# Altium PCB idro900ma.PcbDoc
Units mil, origin at the board's own origin, x right, y up, seen from the top; angles counter-clockwise.
Board outline 6000 x 4000 mil, 2 copper layers (Top Layer, Bottom Layer); 21 components, 17 nets, 93 pads, 11 vias.
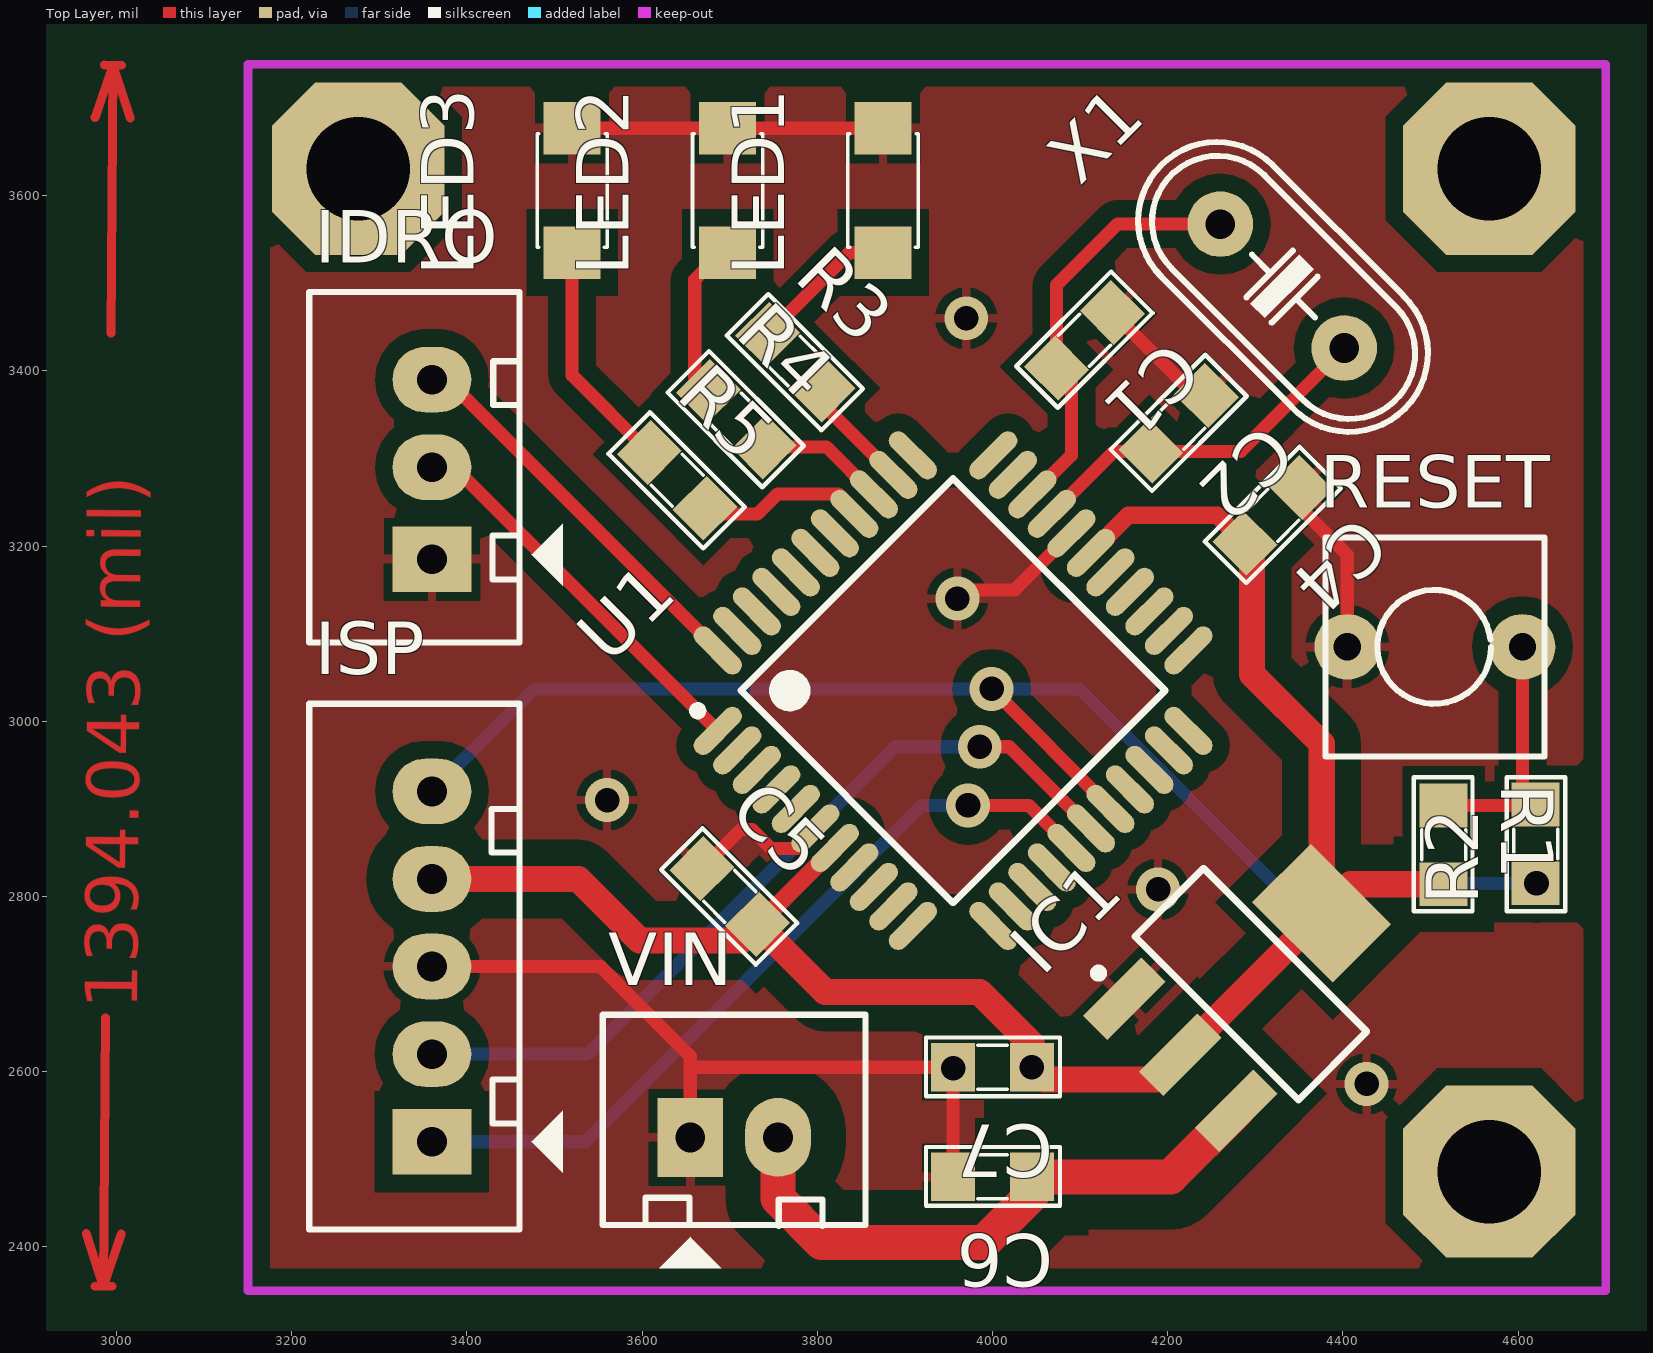
[diagram p0: Top Layer view]
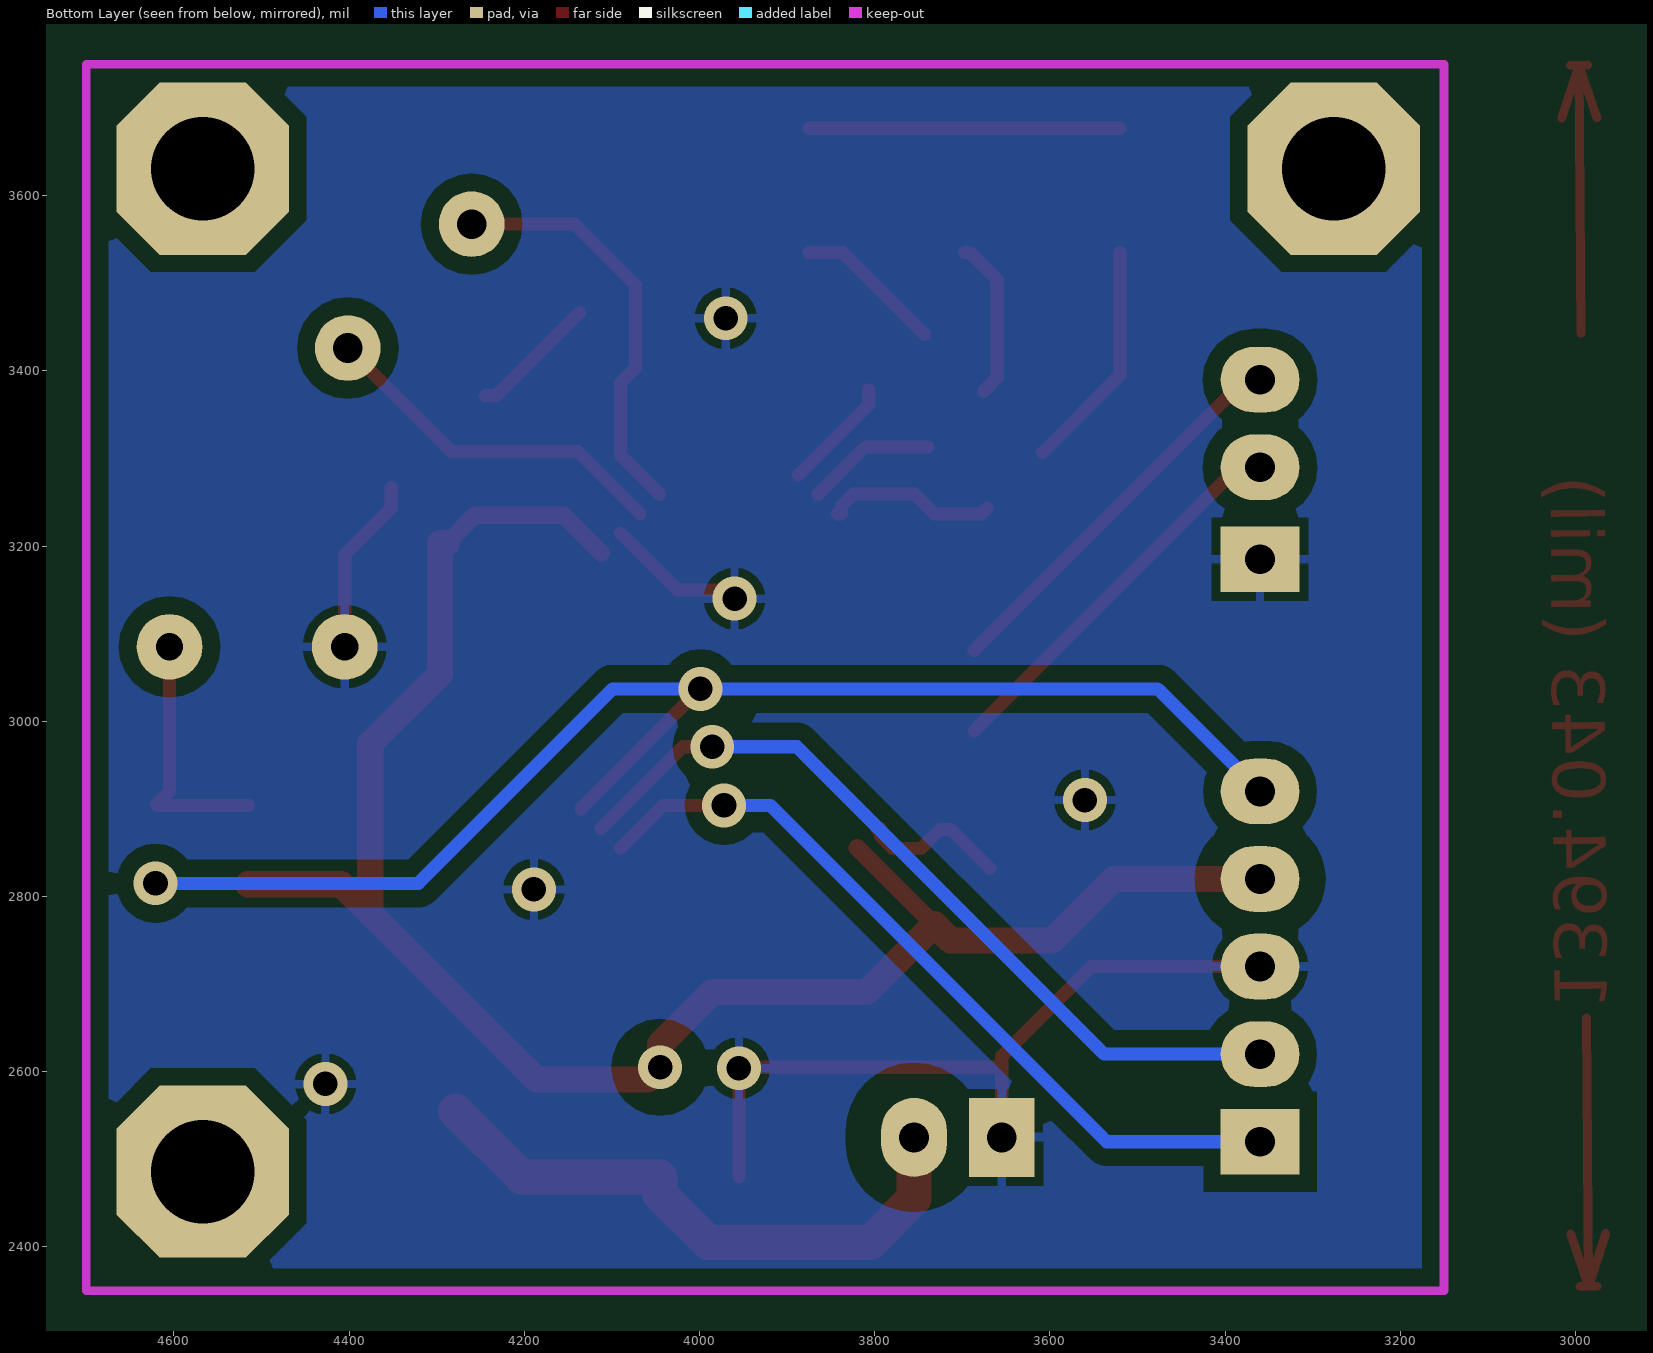
[diagram p1: Bottom Layer view, seen from below]
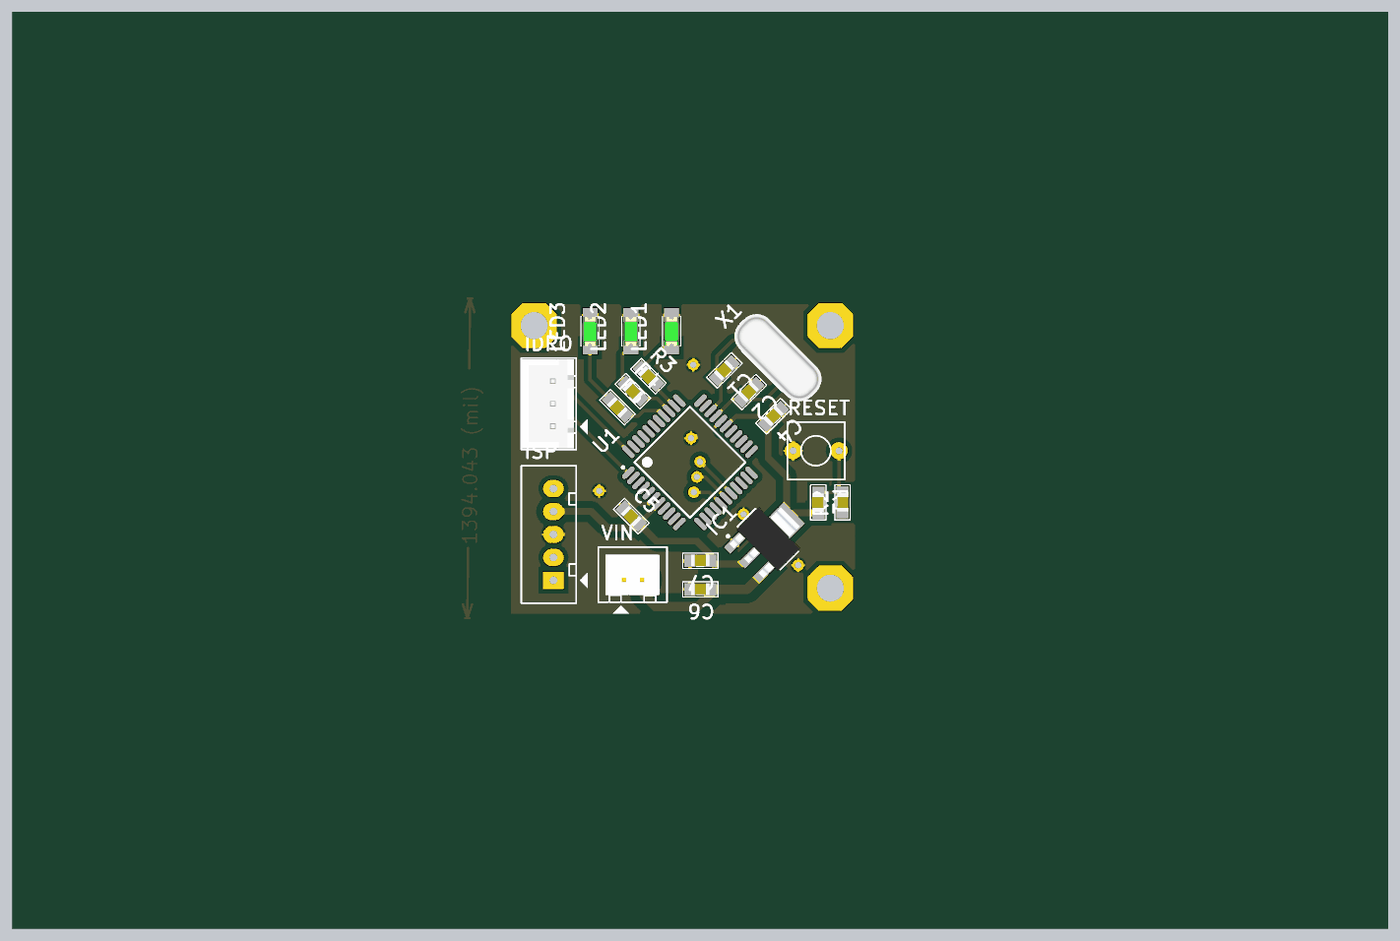
[diagram p2: 3D render of the assembled board from above, using the file's embedded part models]

## Layer stack, top to bottom
Top Layer: signal copper 1.4
Dielectric: dielectric 12.6, FR-4, Dk 4.8
Bottom Layer: signal copper 1.4

## Board outline
1000,1000 7000,1000 7000,5000 1000,5000

## Design rules (kind name [scope] priority, off if disabled: settings)
Clearance COUT [InNet('VCC-3.3V')] p1: gap=30
Clearance CIN [InNet('IN')] p2: gap=40
Clearance [All] p3: gap=20
PolygonConnect [All] p1: connectstyle=Relief reliefconductorwidth=10 reliefentries=4 polygonreliefangle="90 Angle"
RoutingVias [All] p1: holewidth=28 width=50 viastyle="Through Hole" minholewidth=28 minwidth=50 maxholewidth=28 maxwidth=50
SilkscreenOverComponentPads SilkToSolderMaskClearance [IsPad] p1: minsilkscreentomaskgap=10
SolderMaskExpansion [All] p1: expansion=4
Width OUT [InNet('VCC-3.3V')] p1: maxlimit=30 minlimit=20 preferedwidth=30
Width IN [InNet('IN')] p2: maxlimit=40 minlimit=40 preferedwidth=40
Width [All] p3: maxlimit=15 minlimit=15 preferedwidth=15
27 further rules are at their usual default settings.

## Components (designator, comment, footprint, x,y, rotation, side; value= is the part's Value field where it differs from the comment)
C1 "22pF" SM-0805 4105,3435 r225 top
C2 "2pF" SM-0805 4212.5,3340 r225 top
C4 "103" SM-0805 4320,3235 r225 top
C5 "103" SM-0805 3700,2800 r315 top
C6 "1uF/450V" SM-0805 4000,2480 r180 top
C7 "1uF/450V" SM-0805 4000,2605 r180 top
IC1 "LM1117" SOT223-4N 4295,2700 r45 top
IDRO "JP3" CON3 3360,3190 r90 top
ISP "JP5" CON5 3360,2520 r90 top
LED1 "LED" LED1206-Green 3875,3535 r90 top
LED2 "LED" LED1206-Green 3697.5,3535 r90 top
LED3 "LED" LED1206-Green 3520,3535 r90 top
R1 "4.7k" SM-0805 4515,2859 r270 top
R2 "330" SM-0805 4620,2860 r90 top
R3 "220" SM-0805 3775,3410 r315 top
R4 "220" SM-0805 3707.5,3345 r315 top
R5 "220" SM-0805 3640,3275 r315 top
RESET "SW" SW2 4405,3085 r0 top
U1 "PIC18F46K20-I/PT" TQFP-PT44_N 3955,3035 r45 top
VIN "JP2" CON2 3655,2525 r0 top
X1 "4Mhz" XT2 4330.75,3496.82 r135 top

## Footprints (in the part's own frame and the unit in brackets; to place one, negate y for a bottom-side part, rotate by r counter-clockwise, add the part's x,y. Pads: shape width x height; smd on the part's side, far side on the other; paste and mask are expansions set on the pad)
CON2 [mil] "CON2"
  rect 75x90 hole 34: 1(0,0)
  oval 75x90 hole 34: 2(100,0)
  silkscreen extent -100,-150 200,140, body extent -68,-70 168,107, height 236
CON3 [mil] "CON 3"
  rect 75x90 hole 34: 1(-5,0)
  oval 75x90 hole 34: 2(100,0) 3(200,0)
  silkscreen extent -100,-150 300,140, body extent -95,-90 295,136, height 276
CON5 [mil] "CON5"
  rect 75x90 hole 34: 1(0,0)
  oval 75x90 hole 34: 2(100,0) 3(200,0) 4(300,0) 5(400,0)
  silkscreen extent -100,-150 500,140
LED1206-Green [mil]
  rect 60x65 smd: 1(0,0) 2(142,0)
  silkscreen extent 6,-40 136,40, body extent 7,-31 133,32, height 43
SM-0805 [mil] "Compoment SMD 80x50mil"
  rect 50x55 smd: 1(-45,0) 2(45,0)
  silkscreen extent -77,-34 76,33, body extent -40,-27 40,23, height 24
SOT223-4N [mm] "SOT223, 4-Leads, Body 6.5x3.5mm, Pitch 2.3mm, Lead Span 7mm, IPC Medium Density"
  rect 2.4x1 smd: 1(-2.9,2.3) 2(-2.9,0) 3(-2.9,-2.3)
  rect 2.4x3.3 smd: 4(2.9,0)
  silkscreen extent -3.02,-3.35 1.4,3.47, body extent -3.39,-3.27 3.5,3.23, height 1.72
SW2 [mil] "SW button 2pin, 250x 250 mil"
  round 75 hole 31: 1(0,0) 2(200,0)
  silkscreen extent -25,-125 225,125
TQFP-PT44_N [mm] "Thin QFP, 44-Leads, Body 10x10mm, Pitch 0.8mm, IPC Medium Density"
  oval 1.75x0.55 smd: 1(-5.65,4) 2(-5.65,3.2) 3(-5.65,2.4) 4(-5.65,1.6) 5(-5.65,0.8) 6(-5.65,0) 7(-5.65,-0.8) 8(-5.65,-1.6) 9(-5.65,-2.4) 10(-5.65,-3.2) 11(-5.65,-4) 23(5.65,-4) 24(5.65,-3.2) 25(5.65,-2.4) 26(5.65,-1.6) 27(5.65,-0.8) 28(5.65,0) 29(5.65,0.8) 30(5.65,1.6) 31(5.65,2.4) 32(5.65,3.2) 33(5.65,4)
  oval 0.55x1.75 smd: 12(-4,-5.65) 13(-3.2,-5.65) 14(-2.4,-5.65) 15(-1.6,-5.65) 16(-0.8,-5.65) 17(0,-5.65) 18(0.8,-5.65) 19(1.6,-5.65) 20(2.4,-5.65) 21(3.2,-5.65) 22(4,-5.65) 34(4,5.65) 35(3.2,5.65) 36(2.4,5.65) 37(1.6,5.65) 38(0.8,5.65) 39(0,5.65) 40(-0.8,5.65) 41(-1.6,5.65) 42(-2.4,5.65) 43(-3.2,5.65) 44(-4,5.65)
  silkscreen extent -5.77,-4.35 4.35,4.95, body extent -5,-5 5,5, height 1.2
XT2 [mil] "Footpin for Crystal 2 pin"
  round 75 hole 34: 1(-100,0) 2(100,0)
  silkscreen extent -198,-90 195,90, body extent -233,-93 213,90, height 138

## Part data
C1 C2 C4 C5: library part CM, "Cap SMD"
C6 C7: library part CP8, "Cap 4700uF/50V"
IC1: "3v3"
IDRO: library part Con3, "Connector 3"
ISP: library part Con5, "Connector 5"
LED1 LED2 LED3: "LED Single colour Green and Red"
R1 R2 R3 R4 R5: library part R, "Resistor 1/4W"
RESET: library part SW2, "Switch button 2 pin"
U1: "Flash Microcontroller with 10-Bit A/D and nanoWatt Technology, 32K Flash, 44-Pin TQFP, Industrial Temperature Range"
VIN: library part Con2, "Connector 2"
X1: library part XT2, "Crystal For all Crystal 2pin."

## Free pads (board coordinates)
  oct 196.85x196.85 hole 118.11: 0(3276,3631) 0(4567,2486) 0(4567,3631)

## Via types
v1: diameter 50, hole 28, Top Layer to Bottom Layer, 11 vias

## Nets (pads, with @x,y where several pads share a name; then routed paths per layer and width w, separated by ;. In a path a pad name is that pad's centre, name@x,y a point inside that pad or via, vN(x,y) a via of type N, cw(c..) or ccw(c..) an arc to the next point about the centre after c; other vN are vias at no path point)
GND: C1.1 C2.1 C4.1 C5.1 C6.2 C7.2 IC1.1 IDRO.1 ISP.3 LED1.2 LED2.2 LED3.2 RESET.1 U1.6 U1.29 VIN.1 | length 1893.3
  Top Layer w15: ISP.3 3552.75,2720 3655,2617.75 3655,2605 ; LED3.2 LED2.2 LED1.2 ; VIN.1 3655,2605 ; C5.1 3712.8,2876.44 3725.51,2876.44 3747,2854.95 3779.43,2854.95 3793.23,2868.75 3793.23,2877.71 U1.6 ; C6.2 C7.2 3655,2605 ; v1(3960,3140) 3970,3150 4025.46,3150 U1.29 ; C1.1 4231.82,3371.82 C2.1 ; C4.1 4351.82,3243.18 4405,3190 RESET.1
  other v1: 4427,2586 3955,2604 4189,2808 3560,2910 3970,3460
IN: C6.1 IC1.3 VIN.2 | length 688
  Top Layer w40: VIN.2 3755,2455 3805,2405 3990,2405 4045,2460 C6.1 4203.06,2480 IC1.3
LED1: R3.2 U1.35 | length 129.9
  Top Layer w15: R3.2 3806.82,3361.35 U1.35
LED2: R4.2 U1.36 | length 147.6
  Top Layer w15: R4.2 3810.45,3313.18 U1.36
LED3: R5.2 U1.37 | length 197.2
  Top Layer w15: R5.2 3678.17,3236.83 3731.83,3236.83 3754.59,3259.59 3823.98,3259.59 3837.77,3245.8 3837.77,3236.83 U1.37
NetLED1_1: LED1.1 R3.1 | length 170.4
  Top Layer w15: R3.1 3836.36,3535 LED1.1
NetLED2_1: LED2.1 R4.1 | length 184
  Top Layer w15: R4.1 3660,3392.5 3660,3504 3691,3535 LED2.1
NetLED3_1: LED3.1 R5.1 | length 264.7
  Top Layer w15: LED3.1 3520,3395 R5.1
NetR1_1: R1.1 R2.2 RESET.2 | length 291.6
  Top Layer w15: R1.1 4619,2904 R2.2 4605,2920 RESET.2
OSC1: C1.2 U1.31 X1.2 | length 480.1
  Top Layer w15: U1.31 4090,3303.63 4090,3386.36 C1.2 4073.18,3498.18 4142.53,3567.53 X1.2
OSC2: C2.2 U1.30 X1.1 | length 412.1
  Top Layer w15: U1.30 4139.1,3308.18 C2.2 4283.54,3308.18 X1.1
PGC: ISP.1 U1.16 | length 909.2
  Top Layer w15: v1(3972,2904) 4041.46,2904 U1.16
  Bottom Layer w15: ISP.1 3535,2520 3919,2904 v1(3972,2904)
PGD: ISP.2 U1.17 | length 958.5
  Top Layer w15: v1@3989,2958 3980,2967 3980,2971 v1(3985.5,2971) 4019,2971 U1.17
  Bottom Layer w15: ISP.2 3538,2620 3889,2971 v1(3985.5,2971)
RXD: IDRO.2 U1.1 | length 451
  Top Layer w15: IDRO.2 3385.42,3290 U1.1
TXD: IDRO.3 U1.44 | length 454.4
  Top Layer w15: IDRO.3 3377.29,3390 U1.44
VCC-3.3V: C4.2 C5.2 C7.1 IC1.2 IC1.4 ISP.4 R1.2 U1.7 U1.28 | length 2167.3
  Top Layer w20: C5.2 3732.72,2768.18 U1.7 ; U1.28 4155,3235 4256.36,3235 C4.2
  Top Layer w30: ISP.4 3527,2820 3597.3,2749.7 3713.34,2749.7 C5.2 3809,2691 3985.14,2691 4045,2631.14 v1(4045,2605) 4059.03,2590.97 4185.97,2590.97 IC1.2 IC1.4 ; C4.2 4296.17,3203.18 4296.17,3053.83 4375.73,2974.27 IC1.4 ; R1.2 4409,2814 IC1.4
VPP: ISP.5 R2.1 U1.18 | length 1596
  Top Layer w15: v1@3999,3035.54 v1(3999,3037) 4134.56,2901.44 U1.18
  Bottom Layer w15: ISP.5 3477,3037 v1(3999,3037) 4099,3037 4321,2815 v1(4621,2815)
pads on no net: U1.2 U1.3 U1.4 U1.5 U1.8 U1.9 U1.10 U1.11 U1.12 U1.13 U1.14 U1.15 U1.19 U1.20 U1.21 U1.22 U1.23 U1.24 U1.25 U1.26 U1.27 U1.32 U1.33 U1.34 U1.38 U1.39 U1.40 U1.41 U1.42 U1.43
copper on no net: | length 905.3
  Top Layer w10: 2965.47,2415.16 2985,2355 ; 2975,2355.08 2995,2354.92 ; 2975.53,3689.16 2996,3749 ; 2986,3749.08 3006,3748.92 ; 2987.42,2661.13 2985,2355 ; 2993.58,3442.87 2996,3749 ; 3005.47,2414.84 2985,2355 ; 3015.53,3688.84 2996,3749

## Polygon pours and split planes (outlines as drawn)
GND on Bottom Layer "Top Layer-No Net" (solid, remove dead copper, pour order 22): 4700,3739 4696,3743 3150,3743 3150,2350 4700,2350
GND on Top Layer "Top Layer-No Net" (solid, remove dead copper, pour order 24): 3150,3750 3150,2355 3155,2350 4700,2350 4700,3750

## Keep-outs
Keep-Out Layer:
  lines w10: 3150,2350 4700,2350 4700,3750 3150,3750 3150,2350

## Other copper
Top Layer:
  text "1394.043 (mil)" at 3023.48,2670.85 h60 r89.55